# Altium PCB MICROCONTROLLER.PcbDoc
Units mm, origin at the board's own origin, x right, y up, seen from the top; angles counter-clockwise.
Board outline 108.2 x 65.02 mm, 2 copper layers (Top Layer, Bottom Layer); 33 components, 31 nets, 140 pads, 0 vias.
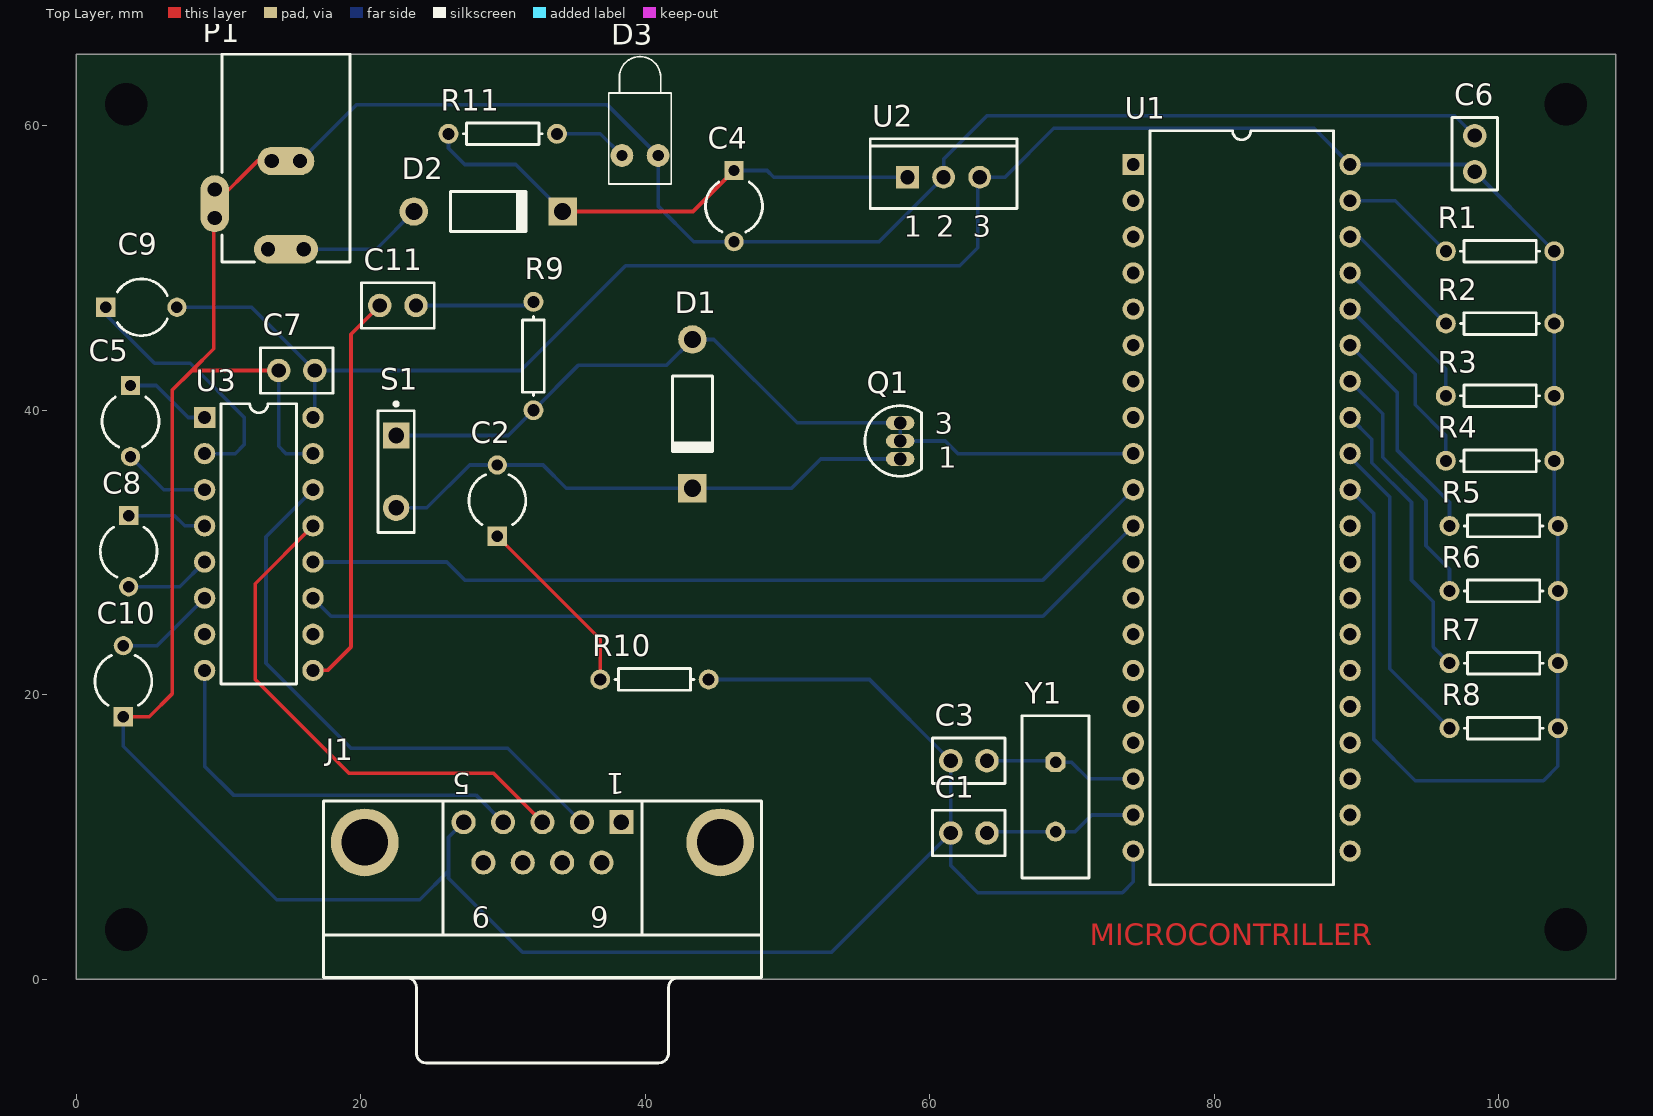
[diagram p0: Top Layer view]
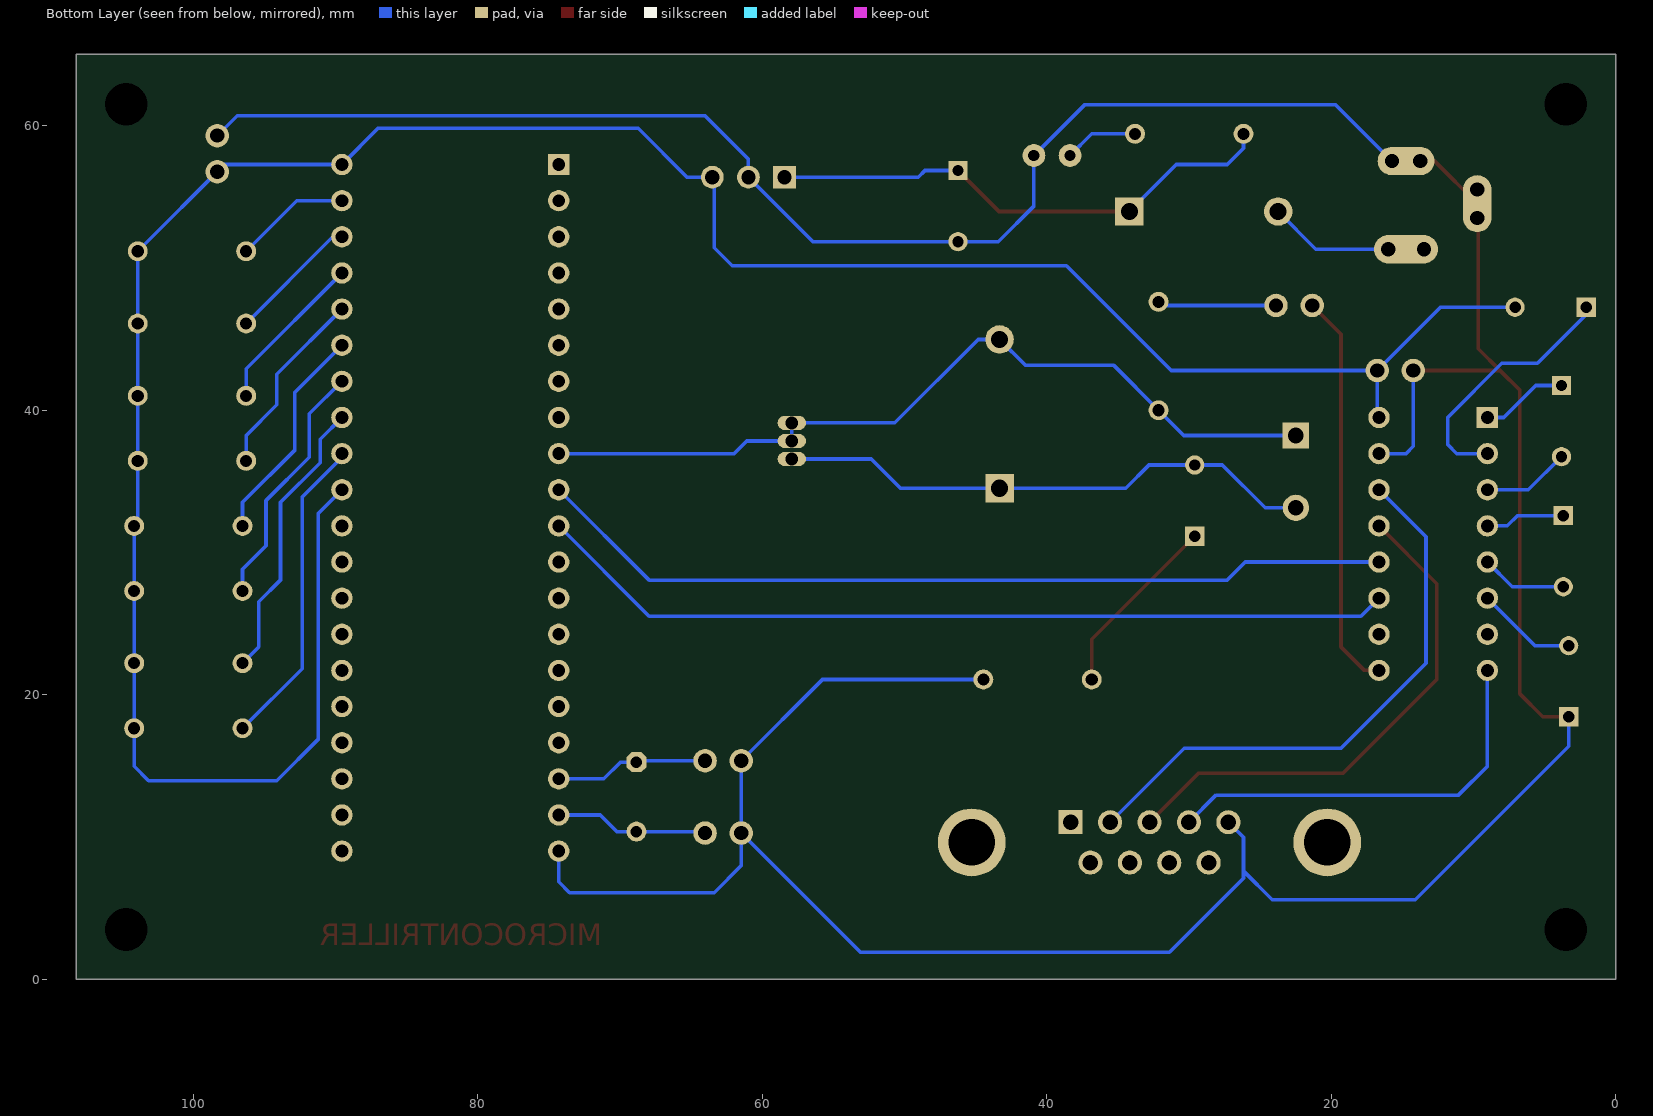
[diagram p1: Bottom Layer view, seen from below]

## Layer stack, top to bottom
Top Layer: signal copper 0.0356
Dielectric: dielectric 0.32, FR-4, Dk 4.8
Bottom Layer: signal copper 0.0356

## Board outline
0,0 0,65.024 108.204,65.024 108.204,0

## Design rules (kind name [scope] priority, off if disabled: settings)
Clearance [All] p1: gap=0.254
PolygonConnect [All] p1: connectstyle=Relief reliefconductorwidth=0.254 reliefentries=4 polygonreliefangle="90 Angle"
RoutingVias [All] p1: holewidth=0.711 width=1.27 viastyle="Through Hole" minholewidth=0.711 minwidth=1.27 maxholewidth=0.711 maxwidth=1.27
SilkscreenOverComponentPads [All] p1: minsilkscreentomaskgap=0.254
SolderMaskExpansion [All] p1: expansion=0.102
Width [All] p1: maxlimit=0.254 minlimit=0.254 preferedwidth=0.254
27 further rules are at their usual default settings.

## Components (designator, comment, footprint, x,y, rotation, side; value= is the part's Value field where it differs from the comment)
C1 "Cap" CAPR2.54-5.1x3.2 62.738,10.287 r180 top
C2 "Cap2" CAPR5-4X5 29.591,33.655 r90 top
C3 "Cap" CAPR2.54-5.1x3.2 62.738,15.367 r180 top
C4 "Cap2" CAPR5-4X5 46.228,54.356 r270 top
C5 "Cap2" CAPR5-4X5 3.81,39.243 r270 top
C6 "Cap" CAPR2.54-5.1x3.2 98.298,58.039 r270 top
C7 "Cap" CAPR2.54-5.1x3.2 15.494,42.799 r180 top
C8 "Cap2" CAPR5-4X5 3.683,30.099 r270 top
C9 "Cap2" CAPR5-4X5 4.572,47.244 r0 top
C10 "Cap2" CAPR5-4X5 3.302,20.955 r90 top
C11 "Cap" CAPR2.54-5.1x3.2 22.606,47.371 r0 top
D1 "Diode 1N4007" DIO10.46-5.3x2.8 43.307,39.751 r270 top
D2 "Diode 1N4007" DIO10.46-5.3x2.8 28.956,53.975 r0 top
D3 "LED1" LED-1 39.624,57.912 r90 top
J1 "D Connector 9" DSUB1.385-2H9 32.766,0.127 r180 top
P1 "PWR2.5" KLD-0202 14.732,65.024 r270 top
Q1 "2N3906" BCY-W3/E4 57.912,37.846 r0 top
R1 "Res1" AXIAL-0.3 100.076,51.181 r0 top
R2 "Res1" AXIAL-0.3 100.076,46.101 r0 top
R3 "Res1" AXIAL-0.3 100.076,41.021 r0 top
R4 "Res1" AXIAL-0.3 100.076,36.449 r0 top
R5 "Res1" AXIAL-0.3 100.33,31.877 r0 top
R6 "Res1" AXIAL-0.3 100.33,27.305 r0 top
R7 "Res1" AXIAL-0.3 100.33,22.225 r0 top
R8 "Res1" AXIAL-0.3 100.33,17.653 r0 top
R9 "Res1" AXIAL-0.3 32.131,43.815 r270 top
R10 "Res1" AXIAL-0.3 40.64,21.082 r180 top
R11 "Res1" AXIAL-0.3 29.972,59.436 r180 top
S1 "RESET" SPST-2 22.479,35.687 r270 top
U1 "P89C51RC2HBP" SOT129-1 81.915,33.147 r270 top
U2 "MC7805ACT" 221A-04 60.96,56.388 r0 top
U3 "MAX232N" N016 12.827,30.607 r270 top
Y1 "22.1184MHZ" HC-49U 68.834,12.827 r270 top

## Footprints (in the part's own frame and the unit in brackets; to place one, negate y for a bottom-side part, rotate by r counter-clockwise, add the part's x,y. Pads: shape width x height; smd on the part's side, far side on the other; paste and mask are expansions set on the pad)
221A-04 [mm] "TO, Thru-Hole, Vertical, Heatsink Mounted; 3 In-Line Leads; Pitch 2.54 mm"
  rect 1.6x1.6 hole 1: 1(-2.54,0)
  round 1.6 hole 1: 2(0,0) 3(2.54,0)
  silkscreen extent -5.15,-2.2 5.15,2.7
AXIAL-0.3 [mm] "Axial Device, Thru-Hole; 2 Leads; 0.3 in Pin Spacing"
  round 1.4 hole 0.85: 1(-3.81,0) 2(3.81,0)
  silkscreen extent -2.77,-0.76 2.77,0.76
BCY-W3/E4 [mm] "TO, Flat Index; 3 In-Line, Axial Leads; Body Dia. 4.5mm; Leads 0.51 x 0.48 mm (max)"
  oval 2x1 hole 0.9: 1(0,-1.27) 2(0,0) 3(0,1.27)
  silkscreen extent -2.48,-2.48 1.5,2.48
CAPR2.54-5.1x3.2 [mm] "Capacitor, Ceramic, Thru-Hole, Dipped Radial; Body 5.1 x 3.2 mm (WxT) Pin Spacing 2.54 mm (typ)"
  round 1.65 hole 1: 1(-1.27,0) 2(1.27,0)
  silkscreen extent -2.55,-1.6 2.55,1.6
CAPR5-4X5 [mm] "Capacitor; 2 Leads"
  rect 1.35x1.35 hole 0.8: 1(-2.5,0)
  round 1.35 hole 0.8: 2(2.5,0)
  silkscreen extent -1.69,-2 1.82,2
DIO10.46-5.3x2.8 [mm] "Diode, Axial; Body 5.2 x 2.7 mm (LxDia. max), Lead Dia. 0.86 mm (max)"
  round 2 hole 1.2: 1(-5.23,0)
  rect 2x2 hole 1.2: 2(5.23,0)
  silkscreen extent -2.65,-1.4 2.75,1.4
DSUB1.385-2H9 [mm] "Connector; D Subminiature; 9 Position; Right Angle; Pitch 1.385 mm"
  rect 1.69x1.69 hole 1.09: 1(-5.54,-10.92)
  round 1.69 hole 1.09: 2(-2.77,-10.92) 3(0,-10.92) 4(2.77,-10.92) 5(5.54,-10.92) 6(-4.155,-8.08) 7(-1.385,-8.08) 8(1.385,-8.08) 9(4.155,-8.08)
  round 4.76 hole 3.26: 10(-12.495,-9.5) 11(12.495,-9.5)
  silkscreen extent -15.4,-12.4 15.4,6
HC-49U [mm] "Quartz Crystal, Thru-Hole; 2 Leads; Body 11.35 x 4.65 x 13.46 mm (LxWxH max)"
  oct 1.4x1.4 hole 0.8: 1(-2.44,0)
  round 1.4 hole 0.8: 2(2.44,0)
  silkscreen extent -5.7,-2.35 5.7,2.35
KLD-0202 [mm] "DC Power Jack, 2.5mm, KLD Series, PCB Mount"
  oval 2x4.5 all layers, no hole: 1(13.7,0)
  round 1.5 hole 1: 1A(13.7,-1.25) 1B(13.7,1.25) 2A(7.5,-1) 2B(7.5,1) 3A(9.5,-5) 3B(11.5,-5)
  oval 2x4 all layers, no hole: 2(7.5,0)
  oval 4x2 all layers, no hole: 3(10.5,-5)
  silkscreen extent 0,-4.5 14.6,4.5
LED-1 [mm] "Typical RED GaAs LED; 2 Leads"
  round 1.6 hole 0.8: 1(0,1.27) 2(0,-1.27)
  silkscreen extent -2,-2.2 6.95,2.2
N016 [mm] "DIP; 16 Leads; Row Spacing 7.62 mm; Pitch 2.54 mm"
  rect 1.5x1.5 hole 0.9: 1(-8.89,-3.81)
  round 1.5 hole 0.9: 2(-6.35,-3.81) 3(-3.81,-3.81) 4(-1.27,-3.81) 5(1.27,-3.81) 6(3.81,-3.81) 7(6.35,-3.81) 8(8.89,-3.81) 9(8.89,3.81) 10(6.35,3.81) 11(3.81,3.81) 12(1.27,3.81) 13(-1.27,3.81) 14(-3.81,3.81) 15(-6.35,3.81) 16(-8.89,3.81)
  silkscreen extent -9.85,-2.65 9.85,2.65
SOT129-1 [mm] "DIP, Plastic; 40 Leads; Row Spacing 15.24 mm; Pitch 2.54 mm"
  rect 1.5x1.5 hole 0.9: 1(-24.13,-7.62)
  round 1.5 hole 0.9: 2(-21.59,-7.62) 3(-19.05,-7.62) 4(-16.51,-7.62) 5(-13.97,-7.62) 6(-11.43,-7.62) 7(-8.89,-7.62) 8(-6.35,-7.62) 9(-3.81,-7.62) 10(-1.27,-7.62) 11(1.27,-7.62) 12(3.81,-7.62) 13(6.35,-7.62) 14(8.89,-7.62) 15(11.43,-7.62) 16(13.97,-7.62) 17(16.51,-7.62) 18(19.05,-7.62) 19(21.59,-7.62) 20(24.13,-7.62) 21(24.13,7.62) 22(21.59,7.62) 23(19.05,7.62) 24(16.51,7.62) 25(13.97,7.62) 26(11.43,7.62) 27(8.89,7.62) 28(6.35,7.62) 29(3.81,7.62) 30(1.27,7.62) 31(-1.27,7.62) 32(-3.81,7.62) 33(-6.35,7.62) 34(-8.89,7.62) 35(-11.43,7.62) 36(-13.97,7.62) 37(-16.51,7.62) 38(-19.05,7.62) 39(-21.59,7.62) 40(-24.13,7.62)
  silkscreen extent -26.5,-6.45 26.5,6.45
SPST-2 [mm] "Circuit Breaker; 2 Leads"
  rect 1.85x1.85 hole 1.1: 1(-2.54,0)
  round 1.85 hole 1.1: 2(2.54,0)
  silkscreen extent -4.89,-1.27 4.28,1.27

## Part data
C1 C2 C3 C4 C5 C6 C7 C8 C9 C10 C11: "Capacitor"
D1 D2: "1 Amp General Purpose Rectifier"
D3: "Typical RED GaAs LED"
J1: "Receptacle Assembly, 9 Position, Right Angle"
P1: "Low Voltage Power Supply Connector"
Q1: "PNP General Purpose Amplifier"
R1 R2 R3 R4 R5 R6 R7 R8 R9 R10 R11: "Resistor"
S1: library part SW-SPST, "Single-Pole, Single-Throw Switch"
U1: "80C51 8-Bit Flash Microcontroller Family, 32 kB ISP/IAP Flash with 512 B RAM."
U2: "3-Terminal Positive Fixed Voltage Regulator"
U3: "Dual EIA-232 Driver/Receiver"
Y1: library part ECS-18-13-1, "Crystal Oscillator"

## Free pads (board coordinates)
  round 1.524 hole 3: 0(3.5,3.5) 0(3.5,61.524) 0(104.704,3.5) 0(104.704,61.524)

## Nets (pads, with @x,y where several pads share a name; then routed paths per layer and width w, separated by ;. In a path a pad name is that pad's centre, name@x,y a point inside that pad or via, vN(x,y) a via of type N, cw(c..) or ccw(c..) an arc to the next point about the centre after c; other vN are vias at no path point)
+5V: C6.2 C7.1 C9.2 R1.2 R2.2 R3.2 R4.2 R5.2 R6.2 R7.2 R8.2 U1.31 U1.40 U2.3 U3.16 | length 184.6
  Bottom Layer w0.254: C9.2 12.319,47.244 C7.1 ; U3.16 16.764,39.624 C7.1 ; U1.31 91.186,32.766 91.186,16.891 94.107,13.97 103.124,13.97 104.14,14.986 R8.2 R7.2 R6.2 R5.2 103.886,32.131 R1.2 97.79,57.277 U1.40 86.995,59.817 68.707,59.817 65.278,56.388 U2.3 63.373,56.261 63.373,51.435 62.103,50.165 38.608,50.165 31.242,42.799 C7.1
CH: C11.1 U3.9 | length 28.2
  Top Layer w0.254: U3.9 17.653,21.717 19.304,23.368 19.304,45.339 C11.1
D2: J1.2 U3.14 | length 40.4
  Bottom Layer w0.254: U3.14 13.335,31.115 13.335,22.225 19.304,16.256 30.327,16.256 J1.2
D3: J1.3 U3.13 | length 36.8
  Top Layer w0.254: U3.13 12.573,27.813 12.573,21.082 19.177,14.478 29.335,14.478 J1.3
D4: J1.4 U3.8 | length 29.3
  Bottom Layer w0.254: U3.8 9.017,14.986 11.049,12.954 28.089,12.954 J1.4
GND: C1.2 C3.2 C4.2 C6.1 C7.2 C10.1 D3.2 J1.5 P1.2 P1.2A P1.2B P1.3 P1.3A P1.3B R10.1 U1.20 U2.2 U3.15 | length 271.7
  Top Layer w0.254: C10.1 5.12,18.455 6.731,20.066 6.731,41.402 8.128,42.799 ; 12.732,57.524 P1.3 9.652,54.444 9.652,44.323 8.128,42.799 ; C7.2 8.128,42.799
  Bottom Layer w0.254: C10.1 3.302,16.383 14.097,5.588 24.13,5.588 26.162,7.62 ; C7.2 14.224,37.465 14.732,36.957 U3.15 ; P1.2B 19.676,61.468 37.338,61.468 D3.2 40.894,54.356 43.394,51.856 C4.2 56.428,51.856 U2.2 60.96,57.658 64.008,60.706 96.901,60.706 C6.1 ; J1.5 26.162,9.983 26.162,7.62 ; R10.1 55.753,21.082 C3.2 C1.2 ; U1.20 74.295,6.858 73.533,6.096 63.373,6.096 61.468,8.001 C1.2 ; 26.162,7.62 26.162,7.112 31.369,1.905 53.086,1.905 C1.2
NetC1_1: C1.1 U1.19 Y1.2 | length 10.8
  Bottom Layer w0.254: C1.1 64.108,10.387 Y1.2 70.204,10.387 71.374,11.557 U1.19
NetC2_1: C2.1 R10.2 | length 13.1
  Top Layer w0.254: C2.1 36.83,23.916 R10.2
NetC2_2: C2.2 D1.2 Q1.1 S1.2 | length 38.2
  Bottom Layer w0.254: S1.2 24.638,33.147 27.646,36.155 C2.2 32.806,36.155 34.44,34.521 D1.2 50.269,34.521 52.324,36.576 Q1.1
NetC3_1: C3.1 U1.18 Y1.1 | length 10.8
  Bottom Layer w0.254: C3.1 68.734,15.367 Y1.1 69.95,15.267 71.12,14.097 U1.18
NetC4_1: C4.1 D2.2 R11.2 U2.1 | length 36.5
  Top Layer w0.254: D2.2 43.347,53.975 C4.1
  Bottom Layer w0.254: R11.2 26.162,58.42 27.305,57.277 30.884,57.277 D2.2 ; C4.1 48.554,56.856 49.022,56.388 U2.1
NetC5_1: C5.1 U3.1 | length 6.1
  Bottom Layer w0.254: C5.1 5.628,41.743 7.874,39.497 U3.1
NetC5_2: C5.2 U3.3 | length 6.2
  Bottom Layer w0.254: C5.2 6.136,34.417 U3.3
NetC8_1: C8.1 U3.4 | length 5.6
  Bottom Layer w0.254: C8.1 6.898,32.599 7.62,31.877 U3.4
NetC8_2: C8.2 U3.5 | length 6.1
  Bottom Layer w0.254: C8.2 7.279,27.599 U3.5
NetC9_1: C9.1 U3.2 | length 17.7
  Bottom Layer w0.254: C9.1@2.072,46.736 5.501,43.307 8.001,43.307 11.811,39.497 11.811,37.592 11.176,36.957 U3.2
NetC10_2: C10.2 U3.6 | length 7.1
  Bottom Layer w0.254: C10.2 5.675,23.455 U3.6
NetC11_2: C11.2 R9.1 | length 8.4
  Bottom Layer w0.254: C11.2 31.877,47.371 R9.1
NetD1_1: D1.1 Q1.2 Q1.3 R9.2 S1.1 U1.9 | length 58.7
  Bottom Layer w0.254: S1.1 30.353,38.227 R9.2 35.306,43.18 41.506,43.18 D1.1 44.808,44.981 50.673,39.116 Q1.3 Q1.2 61.087,37.846 61.976,36.957 U1.9
NetD2_1: D2.1 P1.1 P1.1A P1.1B | length 10.1
  Bottom Layer w0.254: P1.1 P1.1B 21.075,51.324 D2.1
NetD3_1: D3.1 R11.1 | length 5.2
  Bottom Layer w0.254: R11.1 36.83,59.436 D3.1
NetR1_1: R1.1 U1.39 | length 8.2
  Bottom Layer w0.254: U1.39 92.71,54.737 R1.1
NetR2_1: R2.1 U1.38 | length 9.3
  Bottom Layer w0.254: U1.38 90.17,52.197 R2.1
NetR3_1: R3.1 U1.37 | length 11.4
  Bottom Layer w0.254: U1.37 96.266,42.926 R3.1
NetR4_1: R4.1 U1.36 | length 13.5
  Bottom Layer w0.254: U1.36 94.107,42.545 94.107,40.386 96.266,38.227 R4.1
NetR5_1: R5.1 U1.35 | length 15.6
  Bottom Layer w0.254: U1.35 92.837,41.275 92.837,37.211 96.52,33.528 R5.1
NetR6_1: R6.1 U1.34 | length 17.6
  Bottom Layer w0.254: U1.34 91.821,39.751 91.821,36.703 94.869,33.655 94.869,30.48 96.52,28.829 R6.1
NetR7_1: R7.1 U1.33 | length 20.2
  Bottom Layer w0.254: U1.33 91.059,37.973 91.059,36.322 93.853,33.528 93.853,28.067 95.377,26.543 95.377,23.368 R7.1
NetR8_1: R8.1 U1.32 | length 22.2
  Bottom Layer w0.254: U1.32 89.535,36.703 92.329,33.909 92.329,21.844 R8.1
RXD: U1.10 U3.12 | length 60.8
  Bottom Layer w0.254: U3.12 26.035,29.337 27.305,28.067 67.945,28.067 U1.10
TXD: U1.11 U3.11 | length 60.8
  Bottom Layer w0.254: U3.11 17.907,25.527 67.945,25.527 U1.11
pads on no net: J1.1 J1.6 J1.7 J1.8 J1.9 J1.10 J1.11 U1.1 U1.2 U1.3 U1.4 U1.5 U1.6 U1.7 U1.8 U1.12 U1.13 U1.14 U1.15 U1.16 U1.17 U1.21 U1.22 U1.23 U1.24 U1.25 U1.26 U1.27 U1.28 U1.29 U1.30 U3.7 U3.10

## Other copper
Top Layer:
  text "MICROCONTRILLER" at 71.247,2.413 h1.52

## Silkscreen, mask and mechanical layers (free items; w line width, h text height)
Mechanical 1:
  the board outline again, w0.254

## Text inside footprints (layer, text, board x,y; h text height)
J1: Top Overlay "1" at 38.556,14.502 h1.5 r180; Top Overlay "5" at 27.726,14.502 h1.5 r180; Top Overlay "9" at 29.111,5.102 h1.5 r180; Top Overlay "6" at 37.421,5.102 h1.5 r180
P1: Mechanical 1 "Mech 2 - Clearance, move to internal plane if present" at 19.798,64.738 h0.3 r270; Mechanical 1 "Mech 1 - Slot cut-out" at 20.298,64.738 h0.3 r270; Mechanical 1 "Assign keep-out area to slot" at 21.298,64.738 h0.3 r270; Mechanical 1 "Alert PCB fab to slot details" at 20.798,64.738 h0.3 r270
Q1: Top Overlay "1" at 60.572,35.946 h1.5; Top Overlay "3" at 60.342,38.356 h1.5
U2: Top Overlay "3" at 63,52.213 h1.5; Top Overlay "2" at 60.46,52.213 h1.5; Top Overlay "1" at 58.17,52.213 h1.5